# EAGLE board CT_schematic (EAGLE 7.6.0)

Size 100 x 80 mm. Coordinates in mm from the lower left corner, seen from the top.
Outline: 0,0 100,0 100,80 0,80 0,0
Copper layers (1*16): Top 0.035mm / dielectric 1.5mm / Bottom 0.035mm
Design rules "default": minimum track width 10mil, minimum drill 24mil, track to track 8mil, track to pad 8mil, pad to pad 8mil, via to via 8mil, smd to smd 8mil, copper to edge 40mil, drill to drill 8mil, minimum pad ring 10mil, minimum via ring 8mil, stop-mask expansion 4mil, vias tented up to drill 0mil, thermal gap 10mil

## Footprints (pad centres in the part's own frame; a part is rotated, then mirrored left to right if it is on the bottom)
C0603 = smd 0.8 x 0.8: 1 -0.762,0; 2 0.762,0
C0402 = smd 0.5 x 0.5: 1 -0.508,0; 2 0.508,0
C0805 = smd 1.2 x 1.3: 1 -1.016,0; 2 1.016,0
C1206 = smd 1.3 x 1.6: 1 -1.524,0; 2 1.524,0
C1210 = smd 1.2 x 2.5: 1 -1.524,0; 2 1.524,0
2220 = smd 1.85 x 5.5: 1 -2.55,0; 2 2.55,0
EXV-9H = smd 3.505 x 1.676: 1 -2.857,0; 2 2.857,0
L0603 = smd 0.8 x 0.8: 1 -0.762,0; 2 0.762,0
WE-HCI_7030/7040/7050 = smd 2.5 x 3: 1 -2.45,0; 2 2.45,0
PJ-037B_PACKAGE = drill 3.7 square: 1 12,0 | drill 3.2 square: 2 6,0
R0603 = smd 0.8 x 0.8: 1 -0.762,0; 2 0.762,0
LQFP100 = smd 0.3 x 1.2: 1 -6,-7.75; 2 -5.5,-7.75; 3 -5,-7.75; 4 -4.5,-7.75; 5 -4,-7.75; 6 -3.5,-7.75; 7 -3,-7.75; 8 -2.5,-7.75; 9 -2,-7.75; 10 -1.5,-7.75; 11 -1,-7.75; 12 -0.5,-7.75; 13 0,-7.75; 14 0.5,-7.75; 15 1,-7.75; 16 1.5,-7.75; 17 2,-7.75; 18 2.5,-7.75; 19 3,-7.75; 20 3.5,-7.75; 21 4,-7.75; 22 4.5,-7.75; 23 5,-7.75; 24 5.5,-7.75; 25 6,-7.75; 51 6,7.75; 52 5.5,7.75; 53 5,7.75; 54 4.5,7.75; 55 4,7.75; 56 3.5,7.75; 57 3,7.75; 58 2.5,7.75; 59 2,7.75; 60 1.5,7.75; 61 1,7.75; 62 0.5,7.75; 63 0,7.75; 64 -0.5,7.75; 65 -1,7.75; 66 -1.5,7.75; 67 -2,7.75; 68 -2.5,7.75; 69 -3,7.75; 70 -3.5,7.75; 71 -4,7.75; 72 -4.5,7.75; 73 -5,7.75; 74 -5.5,7.75; 75 -6,7.75 | smd 1.2 x 0.3: 26 7.75,-6; 27 7.75,-5.5; 28 7.75,-5; 29 7.75,-4.5; 30 7.75,-4; 31 7.75,-3.5; 32 7.75,-3; 33 7.75,-2.5; 34 7.75,-2; 35 7.75,-1.5; 36 7.75,-1; 37 7.75,-0.5; 38 7.75,0; 39 7.75,0.5; 40 7.75,1; 41 7.75,1.5; 42 7.75,2; 43 7.75,2.5; 44 7.75,3; 45 7.75,3.5; 46 7.75,4; 47 7.75,4.5; 48 7.75,5; 49 7.75,5.5; 50 7.75,6; 76 -7.75,6; 77 -7.75,5.5; 78 -7.75,5; 79 -7.75,4.5; 80 -7.75,4; 81 -7.75,3.5; 82 -7.75,3; 83 -7.75,2.5; 84 -7.75,2; 85 -7.75,1.5; 86 -7.75,1; 87 -7.75,0.5; 88 -7.75,0; 89 -7.75,-0.5; 90 -7.75,-1; 91 -7.75,-1.5; 92 -7.75,-2; 93 -7.75,-2.5; 94 -7.75,-3; 95 -7.75,-3.5; 96 -7.75,-4; 97 -7.75,-4.5; 98 -7.75,-5; 99 -7.75,-5.5; 100 -7.75,-6
SAMTEC_FTSH-105-01-L-DV-K = smd 0.762 x 2.794: 1 -2.54,-2.032; 2 -2.54,2.032; 3 -1.27,-2.032; 4 -1.27,2.032; 5 0,-2.032; 6 0,2.032; 7 1.27,-2.032; 8 1.27,2.032; 9 2.54,-2.032; 10 2.54,2.032
SSOP-28 = smd 1.5 x 0.4: 1 -3.625,4.225; 2 -3.625,3.575; 3 -3.625,2.925; 4 -3.625,2.275; 5 -3.625,1.625; 6 -3.625,0.975; 7 -3.625,0.325; 8 -3.625,-0.325; 9 -3.625,-0.975; 10 -3.625,-1.625; 11 -3.625,-2.275; 12 -3.625,-2.925; 13 -3.625,-3.575; 14 -3.625,-4.225; 15 3.625,-4.225; 16 3.625,-3.575; 17 3.625,-2.925; 18 3.625,-2.275; 19 3.625,-1.625; 20 3.625,-0.975; 21 3.625,-0.325; 22 3.625,0.325; 23 3.625,0.975; 24 3.625,1.625; 25 3.625,2.275; 26 3.625,2.925; 27 3.625,3.575; 28 3.625,4.225
182-009-MALE = drill 1.194 pad 1.524 octagon: 1 -5.537,10.923; 2 -2.769,10.923; 3 0,10.923; 4 2.769,10.923; 5 5.537,10.923; 6 -4.153,8.08; 7 -1.384,8.08; 8 1.384,8.08; 9 4.153,8.08 | hole 3.048: -12.446,9.501; 12.446,9.501
QFN-24 = smd 0.7 x 0.305: 1 -1.815,1.25; 2 -1.815,0.75; 3 -1.815,0.25; 4 -1.815,-0.25; 5 -1.815,-0.73; 6 -1.815,-1.25; 13 1.815,-1.25; 14 1.815,-0.75; 15 1.815,-0.25; 16 1.815,0.25; 17 1.815,0.75; 18 1.815,1.25 | smd 0.305 x 0.7: 7 -1.25,-1.815; 8 -0.75,-1.815; 9 -0.25,-1.815; 10 0.25,-1.815; 11 0.75,-1.815; 12 1.25,-1.815; 19 1.25,1.815; 20 0.75,1.815; 21 0.25,1.815; 22 -0.25,1.815; 23 -0.75,1.815; 24 -1.25,1.815 | smd 2.591 x 2.591: 25 0,0
MICRO_USB_AB = smd 0.4 x 1.35: 1 1.3,0.26; 2 0.65,0.26; 3 0,0.26; 4 -0.65,0.26; 5 -1.3,0.26 | drill 0.6 pad 0.95 long: 6 4.175,-2.54; 7 -4.175,-2.54 | drill 0.7 pad 1.1 long: 8 -2.225,0.46; 9 2.225,0.46
SOT143B = smd 1 x 0.7: 1 -0.75,-1 | smd 0.6 x 0.7: 2 0.95,-1; 3 0.95,1; 4 -0.95,1
SOT-23-6 = smd 1.1 x 0.6: 1 -1.4,0.95; 2 -1.4,0; 3 -1.4,-0.95; 4 1.4,-0.95; 5 1.4,0; 6 1.4,0.95
ABS07-32.768KHZ-7-T = smd 1.1 x 2.4: 1 -2.5,0; 2 0,0
ABLS-25.000MHZ-B2F-T = smd 5.6 x 2.8: 1 -3.81,0; 2 5.69,0
ASFL1 = smd 1.7 x 1.5: 1 -1.27,-1.1; 2 1.27,-1.1; 3 1.27,1.1; 4 -1.27,1.1
WSON-8 = smd 0.3 x 0.6: 1 -0.75,0; 2 0.05,0; 3 0.85,0; 4 1.65,0; 5 1.65,3.8; 6 0.85,3.8; 7 0.05,3.8; 8 -0.75,3.8 | smd 3 x 2.6: PAD 0.45,1.9
QFN-16_EP = smd 0.805 x 0.3: 1 -1.452,0.75; 2 -1.452,0.25; 3 -1.452,-0.25; 4 -1.452,-0.75; 9 1.452,-0.75; 10 1.452,-0.25; 11 1.452,0.25; 12 1.452,0.75 | smd 0.3 x 0.805: 5 -0.75,-1.452; 6 -0.25,-1.452; 7 0.25,-1.452; 8 0.75,-1.452; 13 0.75,1.452; 14 0.25,1.452; 15 -0.25,1.452; 16 -0.75,1.452 | smd 1.55 x 1.55: 17 0,0
SON-6 = smd 0.55 x 0.3: 1 -0.355,0.5 | smd 0.52 x 0.3: 2 -0.37,0; 3 -0.37,-0.5; 4 0.37,-0.5; 5 0.37,0; 6 0.37,0.5
SW_4-1437565-2 = smd 1.4 x 2.1: 1 -2.23,4.55; 2 -2.23,-4.55; 3 2.23,4.55; 4 2.23,-4.55
LGM67K-G1J2-24-Z = smd 0.8 x 1.4: A -2,0; C 0,0
NC7SZ125M5X = smd 1.3 x 0.7: 1 -1.3,0.95; 2 -1.3,0; 3 -1.3,-0.95; 4 1.3,-0.95; 5 1.3,0.95

## Placement (x,y rotation side)
C1  1e-06  [C0603]  -64.77,74.93 0 top  (outside the outline)
C2  1e-07  [C0603]  -68.58,74.93 0 top  (outside the outline)
C3  1e-07  [C0603]  -72.39,74.93 0 top  (outside the outline)
C4  1e-07  [C0603]  -76.2,74.93 0 top  (outside the outline)
C5  1e-07  [C0603]  -80.01,74.93 0 top  (outside the outline)
C6  1e-07  [C0603]  -83.82,74.93 0 top  (outside the outline)
C7  1e-07  [C0603]  -15.24,80.01 0 top  (outside the outline)
C8  4.7e-06  [C0603]  -49.53,74.93 0 top  (outside the outline)
C9  2.2e-06  [C0603]  -53.34,74.93 0 top  (outside the outline)
C10  2.2e-06  [C0603]  -57.15,74.93 0 top  (outside the outline)
C11  1e-08  [C0603]  -19.05,80.01 0 top  (outside the outline)
C12  1e-06  [C0603]  -22.86,80.01 0 top  (outside the outline)
C13  1e-11  [C0402]  -80.01,80.01 0 top  (outside the outline)
C14  1e-11  [C0402]  -83.82,80.01 0 top  (outside the outline)
C15  1e-11  [C0402]  -15.24,85.09 0 top  (outside the outline)
C16  1e-11  [C0402]  -19.05,85.09 0 top  (outside the outline)
C17  1e-07  [C0402]  -22.86,85.09 0 top  (outside the outline)
C18  1e-07  [C0402]  -26.67,85.09 0 top  (outside the outline)
C19  1e-07  [C0402]  -30.48,85.09 0 top  (outside the outline)
C20  1e-07  [C0402]  -34.29,85.09 0 top  (outside the outline)
C21  1e-07  [C0402]  -38.1,85.09 0 top  (outside the outline)
C22  1e-07  [C0402]  -41.91,85.09 0 top  (outside the outline)
C23  1e-08  [C0402]  -45.72,85.09 0 top  (outside the outline)
C24  2.2e-06  [C0603]  -60.96,74.93 0 top  (outside the outline)
C25  1e-08  [C0402]  -49.53,85.09 0 top  (outside the outline)
C26  1e-08  [C0402]  -53.34,85.09 0 top  (outside the outline)
C27  1e-06  [C0603]  -26.67,80.01 0 top  (outside the outline)
C28  1e-08  [C0402]  -57.15,85.09 0 top  (outside the outline)
C29  1e-06  [C0603]  -30.48,80.01 0 top  (outside the outline)
C30  1e-05  [C0805]  -21.59,68.58 0 top  (outside the outline)
C31  1e-08  [C0402]  -60.96,85.09 0 top  (outside the outline)
C32  1e-05  [C1206]  -62.23,60.96 0 top  (outside the outline)
C33  1e-05  [C1210]  -55.88,60.96 0 top  (outside the outline)
C34  1e-05  [C0805]  -26.67,68.58 0 top  (outside the outline)
C35  1e-06  [C0603]  -34.29,80.01 0 top  (outside the outline)
C36  1e-07  [C0402]  -64.77,85.09 0 top  (outside the outline)
C37  6.8e-05  [2220]  -36.83,41.91 0 top  (outside the outline)
C38  1e-07  [C0402]  -68.58,85.09 0 top  (outside the outline)
C39  0.0001  [EXV-9H]  -35.56,53.34 0 top  (outside the outline)
C40  0.0001  [EXV-9H]  -46.99,53.34 0 top  (outside the outline)
C41  1e-08  [C0402]  -72.39,85.09 0 top  (outside the outline)
C42  1e-08  [C0402]  -76.2,85.09 0 top  (outside the outline)
C43  1e-08  [C0402]  -80.01,85.09 0 top  (outside the outline)
F1  240.0  [L0603]  -38.1,80.01 0 top  (outside the outline)
I1  3.3e-06  [WE-HCI_7030/7040/7050]  -76.2,27.94 0 top  (outside the outline)
J1  PJ-037B  [PJ-037B_PACKAGE]  -57.15,29.21 0 top  (outside the outline)
R2  1000.0  [R0603]  -41.91,80.01 0 top  (outside the outline)
R4  4700.0  [R0603]  -45.72,80.01 0 top  (outside the outline)
R5  4700.0  [R0603]  -49.53,80.01 0 top  (outside the outline)
R6  10000.0  [R0603]  -72.39,68.58 0 top  (outside the outline)
R7  10000.0  [R0603]  -77.47,68.58 0 top  (outside the outline)
R8  10000.0  [R0603]  -82.55,68.58 0 top  (outside the outline)
R9  10000.0  [R0603]  -15.24,74.93 0 top  (outside the outline)
R10  10000.0  [R0603]  -20.32,74.93 0 top  (outside the outline)
R11  5.0  [R0603]  -53.34,80.01 0 top  (outside the outline)
R12  100000.0  [R0603]  -31.75,68.58 0 top  (outside the outline)
R13  47000.0  [R0603]  -25.4,74.93 0 top  (outside the outline)
R14  8060.0  [R0603]  -57.15,80.01 0 top  (outside the outline)
R15  100000.0  [R0603]  -36.83,68.58 0 top  (outside the outline)
R16  36000.0  [R0603]  -30.48,74.93 0 top  (outside the outline)
R17  100000.0  [R0603]  -41.91,68.58 0 top  (outside the outline)
R18  100000.0  [R0603]  -46.99,68.58 0 top  (outside the outline)
R19  2231.0  [R0603]  -60.96,80.01 0 top  (outside the outline)
R20  1000.0  [R0603]  -64.77,80.01 0 top  (outside the outline)
R21  20000.0  [R0603]  -35.56,74.93 0 top  (outside the outline)
R22  150000.0  [R0603]  -52.07,68.58 0 top  (outside the outline)
R23  300000.0  [R0603]  -57.15,68.58 0 top  (outside the outline)
R24  10000.0  [R0603]  -40.64,74.93 0 top  (outside the outline)
R25  10000.0  [R0603]  -45.72,74.93 0 top  (outside the outline)
R26  9100.0  [R0603]  -68.58,80.01 0 top  (outside the outline)
R27  680000.0  [R0603]  -62.23,68.58 0 top  (outside the outline)
R28  120000.0  [R0603]  -67.31,68.58 0 top  (outside the outline)
U1  STM32F205VBT6  [LQFP100]  -63.5,8.89 0 top  (outside the outline)
U2  FTSH-105-01-L-DV-K  [SAMTEC_FTSH-105-01-L-DV-K]  -35.56,30.48 0 top  (outside the outline)
U3  ST3241EBPR  [SSOP-28]  -78.74,7.62 0 top  (outside the outline)
U4  182-009-113R531  [182-009-MALE]  -36.83,6.35 0 top  (outside the outline)
U5  USB3317C-CP-TR  [QFN-24]  -48.26,60.96 0 top  (outside the outline)
U6  47590-0001  [MICRO_USB_AB]  -66.04,30.48 0 top  (outside the outline)
U7  prtr5v0u2ax  [SOT143B]  -24.13,90.17 0 top  (outside the outline)
U8  MAX4995AAUT+T  [SOT-23-6]  -67.31,59.69 0 top  (outside the outline)
U9  ABS07-32.768KHZ-7-T  [ABS07-32.768KHZ-7-T]  -27.94,62.23 0 top  (outside the outline)
U10  ABLS-25.000MHZ-B2F-T  [ABLS-25.000MHZ-B2F-T]  -66.04,53.34 0 top  (outside the outline)
U11  ASFL1-26MHZ-NCS  [ASFL1]  -26.67,53.34 0 top  (outside the outline)
U12  LP2951ACSDX/NOPB  [WSON-8]  -76.2,40.64 0 top  (outside the outline)
U13  LP3878SDX-ADJ/NOPB  [WSON-8]  -58.42,40.64 0 top  (outside the outline)
U14  LTC3601EUD#PBF  [QFN-16_EP]  -73.66,80.01 0 top  (outside the outline)
U15  TPS3895ADRYR  [SON-6]  -27.94,88.9 0 top  (outside the outline)
U16  4-1437565-2  [SW_4-1437565-2]  -27.94,43.18 0 top  (outside the outline)
U17  Q65110A2395  [LGM67K-G1J2-24-Z]  -36.83,60.96 0 top  (outside the outline)
U18  nc7sz125m5x  [NC7SZ125M5X]  -72.39,59.69 0 top  (outside the outline)
U19  nc7sz125m5x  [NC7SZ125M5X]  -78.74,59.69 0 top  (outside the outline)
U20  nc7sz125m5x  [NC7SZ125M5X]  -15.24,68.58 0 top  (outside the outline)

## Library data of the parts
C1-C43 F1 I1 J1 R2 R4-R28 U1-U20 = circuit_tree

## Nets
CLK_CRYSTAL_U1_8: C13.1 U1.8 U9.1
CLK_CRYSTAL_U1_9: C14.1 U1.9 U9.2
CLK_CRYSTAL_U1_12: C15.1 U1.12 U10.1
CLK_CRYSTAL_U1_13: C16.1 U1.13 U10.2
CLK_U5_23: U5.23 U11.3
GND: C1.2 C2.2 C3.2 C4.2 C5.2 C6.2 C7.2 C8.2 C9.2 C10.2 C11.2 C12.2 C13.2 C14.2 C15.2 C16.2 C17.2 C18.2 C21.2 C22.2 C23.2 C24.2 C25.2 C26.2 C27.2 C28.2 C29.2 C30.2 C31.2 C32.2 C33.2 C34.2 C35.2 C37.1 C37.2 C38.2 C39.2 C40.2 C41.2 C42.2 C43.2 J1.2 R2.2 R6.2 R10.2 R11.2 R13.2 R14.2 R17.2 R20.2 R21.2 R23.2 R26.2 R28.2 U1.10 U1.20 U1.27 U1.74 U2.3 U2.5 U3.23 U3.25 U4.5 U5.25 U6.5 U6.6 U6.7 U6.8 U6.9 U7.1 U8.2 U11.2 U12.3 U12.4 U12.PAD U13.3 U13.PAD U14.1 U14.9 U14.17 U15.2 U17.C U18.2 U18.3 U19.1 U19.3 U20.1 U20.3
NET_U1_14: R4.1 U1.14 U19.4
NET_U1_22: C11.1 C12.1 F1.1 U1.21 U1.22
NET_U1_49: C9.1 U1.49
NET_U1_73: C10.1 U1.73
NET_U1_94: R6.1 U1.94
NET_U1_97: U17.A
NET_U1_98: U16.3 U16.4
NET_U2_9: R11.1 U2.9
NET_U3_1: C20.1 U3.1
NET_U3_2: C20.2 U3.2
NET_U3_3: C22.1 U3.3
NET_U3_22: R12.1 U3.22
NET_U3_24: C19.2 U3.24
NET_U3_27: C21.1 U3.27
NET_U3_28: C19.1 U3.28
NET_U4_2: U3.4 U4.2
NET_U4_3: U3.9 U4.3
NET_U4_7: U3.5 U4.7
NET_U4_8: U3.10 U4.8
NET_U5_4: C24.1 U5.4
NET_U5_22: R5.1 U5.22 U20.4
NET_U5_24: R14.1 U5.24
NET_U6_1: C27.1 U5.2 U6.1 U7.4 U8.1
NET_U6_2: U5.5 U6.2 U7.3
NET_U6_3: U5.6 U6.3 U7.2
NET_U6_4: U5.1 U6.4
NET_U8_1: U8.1
NET_U8_3: R13.1 U8.3
NET_U8_4: U5.7 U8.4
NET_U12_5: R15.1 U12.5
NET_U12_7: R16.2 R17.1 U12.7
NET_U13_1: C31.1 U13.1
NET_U13_6: R19.2 R20.1 U13.6
NET_U13_8: R18.1 U13.8
NET_U14_3: C36.2 I1.1 U14.3 U14.4
NET_U14_6: C36.1 U14.6
NET_U14_7: C35.1 U14.7 U14.12
NET_U14_10: R23.1 U14.10
NET_U14_11: R21.1 R22.1 U14.11
NET_U14_14: U14.14
NET_U14_ATNET_3: I1.2 R22.2
NET_U15_1: R25.1 R26.1 U15.1
NET_U15_3: R27.2 R28.1 U15.3
NET_U15_4: R24.1 U15.4 U18.4 U19.2 U20.2
NET_U16_1: R2.1 U16.1 U16.2
PROC_SYS_JTCK_SWCLK: R10.1 U1.76 U2.4
PROC_SYS_JTDI: R8.1 U1.77 U2.8
PROC_SYS_JTDO_SWO: U1.89 U2.6
PROC_SYS_JTMS_SWDIO: R9.1 U1.72 U2.2
PROC_UART4_RX: U1.24 U3.19
PROC_UART4_TX: U1.23 U3.14
PROC_USB_OTG_HS_ULPI_CK: U1.30 U5.12
PROC_USB_OTG_HS_ULPI_D0: U1.26 U5.16
PROC_USB_OTG_HS_ULPI_D1: U1.35 U5.15
PROC_USB_OTG_HS_ULPI_D2: U1.36 U5.14
PROC_USB_OTG_HS_ULPI_D3: U1.47 U5.13
PROC_USB_OTG_HS_ULPI_D4: U1.48 U5.11
PROC_USB_OTG_HS_ULPI_D5: U1.51 U5.10
PROC_USB_OTG_HS_ULPI_D6: U1.52 U5.9
PROC_USB_OTG_HS_ULPI_D7: U1.91 U5.8
PROC_USB_OTG_HS_ULPI_DIR: U1.17 U5.19
PROC_USB_OTG_HS_ULPI_NXT: U1.18 U5.18
PROC_USB_OTG_HS_ULPI_STP: U1.15 U5.20
RST_OUT_U2_JTAG_RST_B: R7.1 U2.10 U18.1
VCC_S1_5V9: C29.1 C32.1 C34.1 C39.1 C40.1 J1.1 R18.2 U12.8 U13.4 U14.15 U14.16
VCC_TIER1_1V8: C26.1 C30.1 C41.1 C42.1 C43.1 R15.2 R16.1 U5.21 U12.1 U18.5 U19.5 U20.5
VCC_TIER1_3V3: C1.1 C2.1 C3.1 C4.1 C5.1 C6.1 C7.1 C8.1 C17.1 C18.1 C23.1 C25.1 C28.1 C33.1 C38.1 F1.2 R4.2 R5.2 R7.2 R8.2 R9.2 R12.2 R19.1 R24.2 R25.2 R27.1 U1.6 U1.11 U1.19 U1.28 U1.50 U1.75 U1.100 U2.1 U3.26 U5.3 U5.17 U11.4 U13.5 U15.6
VCC_TIER1_5V0: C37.2 I1.2 R22.2 U8.5 U14.8

## Tracks (layer width: path | path; a pad name or v marks a point on that pad's centre or on a via)
CLK_CRYSTAL_U1_8  (2 unrouted)
CLK_CRYSTAL_U1_9  (2 unrouted)
CLK_CRYSTAL_U1_12  (2 unrouted)
CLK_CRYSTAL_U1_13  (2 unrouted)
CLK_U5_23  (1 unrouted)
GND  (87 unrouted)
NET_U1_14  (2 unrouted)
NET_U1_22  (4 unrouted)
NET_U1_49  (1 unrouted)
NET_U1_73  (1 unrouted)
NET_U1_94  (1 unrouted)
NET_U1_98  (1 unrouted)
NET_U2_9  (1 unrouted)
NET_U3_1  (1 unrouted)
NET_U3_2  (1 unrouted)
NET_U3_3  (1 unrouted)
NET_U3_22  (1 unrouted)
NET_U3_24  (1 unrouted)
NET_U3_27  (1 unrouted)
NET_U3_28  (1 unrouted)
NET_U4_2  (1 unrouted)
NET_U4_3  (1 unrouted)
NET_U4_7  (1 unrouted)
NET_U4_8  (1 unrouted)
NET_U5_4  (1 unrouted)
NET_U5_22  (2 unrouted)
NET_U5_24  (1 unrouted)
NET_U6_1  (4 unrouted)
NET_U6_2  (2 unrouted)
NET_U6_3  (2 unrouted)
NET_U6_4  (1 unrouted)
NET_U8_3  (1 unrouted)
NET_U8_4  (1 unrouted)
NET_U12_5  (1 unrouted)
NET_U12_7  (2 unrouted)
NET_U13_1  (1 unrouted)
NET_U13_6  (2 unrouted)
NET_U13_8  (1 unrouted)
NET_U14_3  (3 unrouted)
NET_U14_6  (1 unrouted)
NET_U14_7  (2 unrouted)
NET_U14_10  (1 unrouted)
NET_U14_11  (2 unrouted)
NET_U14_ATNET_3  (1 unrouted)
NET_U15_1  (2 unrouted)
NET_U15_3  (2 unrouted)
NET_U15_4  (4 unrouted)
NET_U16_1  (2 unrouted)
PROC_SYS_JTCK_SWCLK  (2 unrouted)
PROC_SYS_JTDI  (2 unrouted)
PROC_SYS_JTDO_SWO  (1 unrouted)
PROC_SYS_JTMS_SWDIO  (2 unrouted)
PROC_UART4_RX  (1 unrouted)
PROC_UART4_TX  (1 unrouted)
PROC_USB_OTG_HS_ULPI_CK  (1 unrouted)
PROC_USB_OTG_HS_ULPI_D0  (1 unrouted)
PROC_USB_OTG_HS_ULPI_D1  (1 unrouted)
PROC_USB_OTG_HS_ULPI_D2  (1 unrouted)
PROC_USB_OTG_HS_ULPI_D3  (1 unrouted)
PROC_USB_OTG_HS_ULPI_D4  (1 unrouted)
PROC_USB_OTG_HS_ULPI_D5  (1 unrouted)
PROC_USB_OTG_HS_ULPI_D6  (1 unrouted)
PROC_USB_OTG_HS_ULPI_D7  (1 unrouted)
PROC_USB_OTG_HS_ULPI_DIR  (1 unrouted)
PROC_USB_OTG_HS_ULPI_NXT  (1 unrouted)
PROC_USB_OTG_HS_ULPI_STP  (1 unrouted)
RST_OUT_U2_JTAG_RST_B  (2 unrouted)
VCC_S1_5V9  (10 unrouted)
VCC_TIER1_1V8  (11 unrouted)
VCC_TIER1_3V3  (39 unrouted)
VCC_TIER1_5V0  (4 unrouted)